# Altium PCB P-MT3620RDB-PS-1-0.PcbDoc (part 2 of 2)
Units mm, origin at the board's own origin, x right, y up, seen from the top; angles counter-clockwise.
Board outline 50 x 35 mm, 4 copper layers (Component Side, GND, 3V3, Bottom Layer), stack 0.537 mm thick; 57 components, 42 nets, 256 pads, 95 vias.
Unrouted connection lines stored in the file: 54.
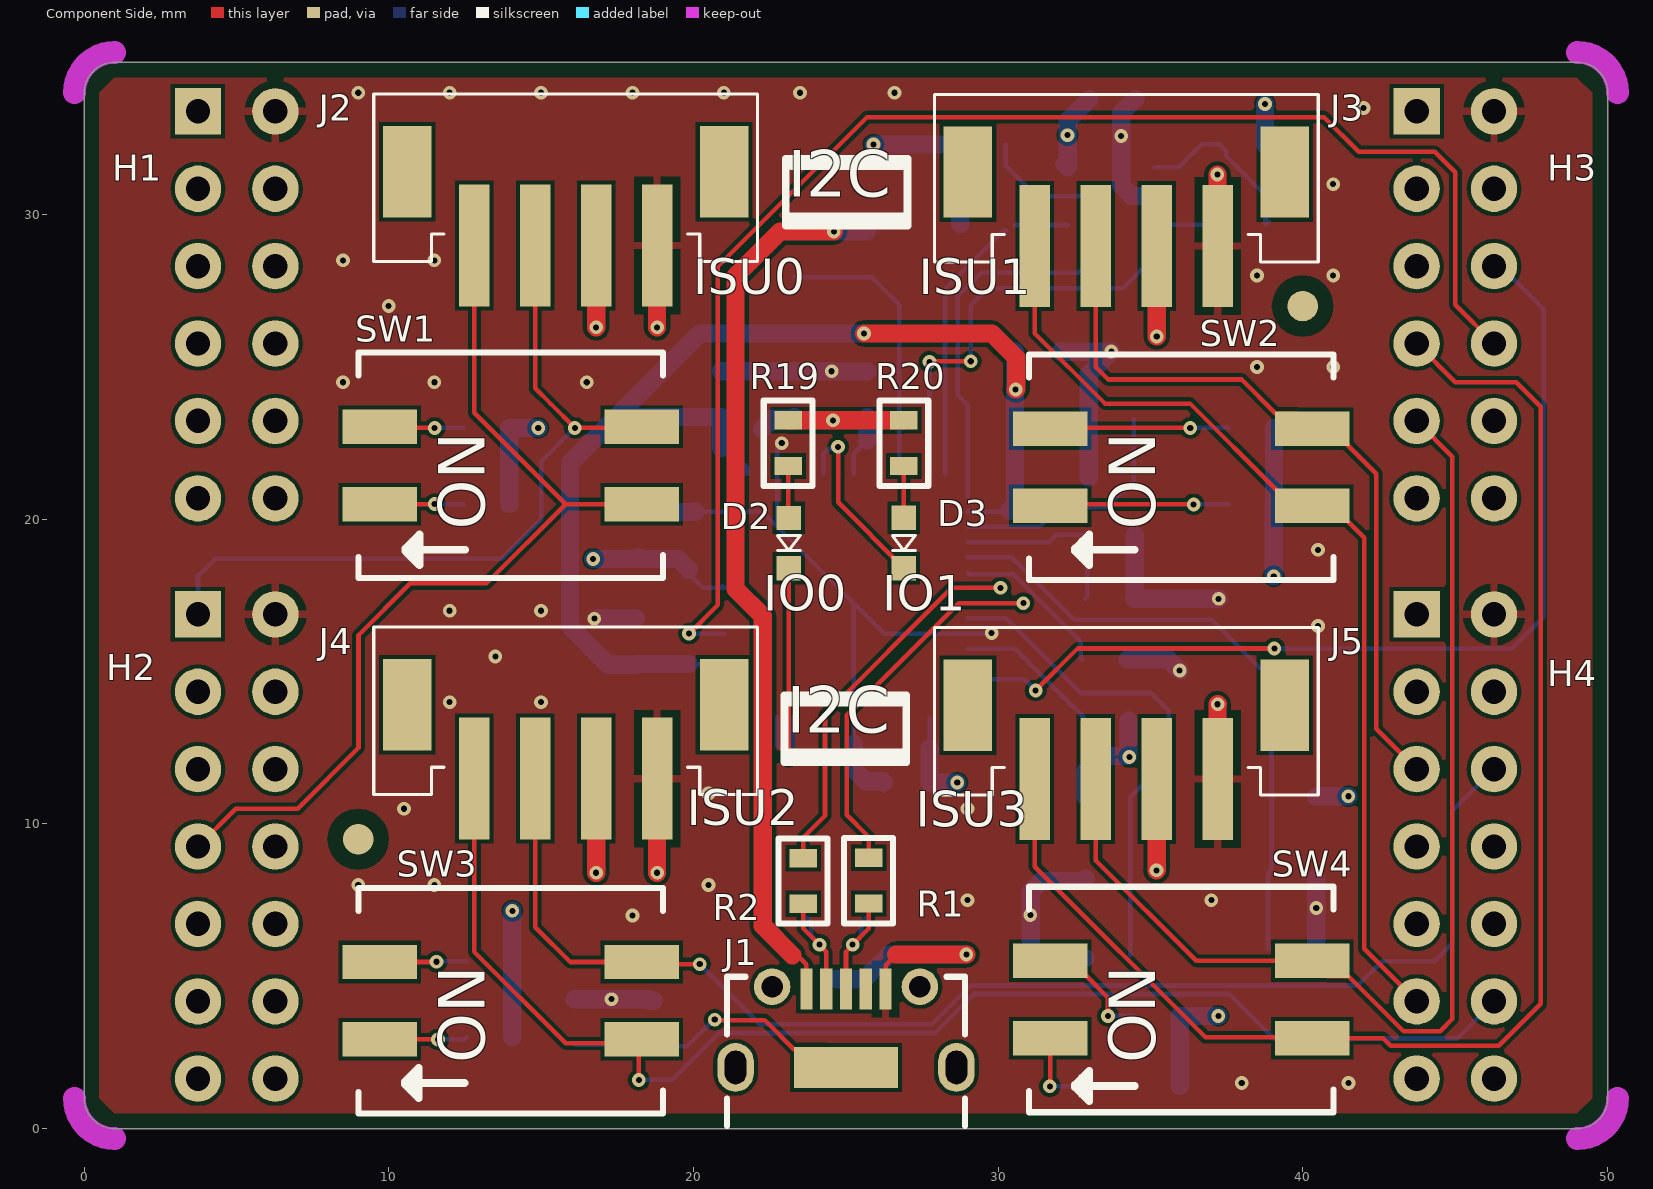
[diagram p0: Component Side view]

## Part data (continued)
X1: library part 8Z-12.000MAAJ-T, "Crystal 12MHz ±30ppm (Tol) ±30ppm (Stability) 18pF FUND 150Ohm 4-Pin SMD T/R", Case/Package=SMD/SMT, ESR (Equivalent Series Resistance)=150R, Frequency Stability=30ppm, Load Capacitance=18pF, Manufacturer=TXC, Max Operating Temperature=70°C, Min Operating Temperature=-20°C, Package Quantity=1, Supplier Part Number 1=887-1487-1-ND, Category=Crystals, ComponentLink1Description=https://datasheet.ciiva.com/28498/1838674-28498900.pdf?src-supplier=Element14, ComponentLink1URL=https://datasheet.ciiva.com/28498/1838674-28498900.pdf?src-supplier=Element14, ComponentLink2Description=https://datasheet.ciiva.com/4950/8z-12784-4950167.pdf?src-supplier=Mouser, ComponentLink2URL=https://datasheet.ciiva.com/4950/8z-12784-4950167.pdf?src-supplier=Mouser, ComponentLink3Description=https://datasheet.ciiva.com/859/8z-859072.pdf?src-supplier=Digi-Key, ComponentLink3URL=https://datasheet.ciiva.com/859/8z-859072.pdf?src-supplier=Digi-Key, ComponentLink4Description=https://datasheet.ciiva.com/859/8z-859073.pdf?src-supplier=Digi-Key, ComponentLink4URL=https://datasheet.ciiva.com/859/8z-859073.pdf?src-supplier=Digi-Key, ComponentLink5Description=https://datasheet.ciiva.com/859/8z-859071.pdf?src-supplier=Digi-Key, ComponentLink5URL=https://datasheet.ciiva.com/859/8z-859071.pdf?src-supplier=Digi-Key, ComponentLink6Description=https://datasheet.ciiva.com/8047/1041872-8047871.pdf?src-supplier=Element14, ComponentLink6URL=https://datasheet.ciiva.com/8047/1041872-8047871.pdf?src-supplier=Element14, Depth=2mm, Frequency=12MHz, Frequency Tolerance=30ppm, Height=0.022inch, Length=2.5mm, Manufacturer Part Number=8Z-12.000MAAJ-T, Mount="Surface Mount", Number of Pins=4, Packaging="Tape and Reel", Pricing 1="1=1.35000, 10=1.29000, 50=1.26000, 100=1.08000, 500=1.05000, 1000=0.88500 (USD)", REACH SVHC="No SVHC", RoHS=Yes, Stock 1=6521, Supplier 1=Digi-Key, Termination=SMD/SMT, Tolerance=30ppm, Width=0.079inch

## Free pads (board coordinates)
  round 1 smd far side paste-1 mask+0.5: 1(9,9.5) 1(40,27)
  round 1 smd paste-1 mask+0.5: 1(9,9.5) 1(40,27)

## Via types
v1: diameter 0.45, hole 0.2, Component Side to Bottom Layer, tented both sides, 95 vias

## Nets (pads, with @x,y where several pads share a name; then routed paths per layer and width w, separated by ;. In a path a pad name is that pad's centre, name@x,y a point inside that pad or via, vN(x,y) a via of type N, cw(c..) or ccw(c..) an arc to the next point about the centre after c; other vN are vias at no path point)
1V8: C5.2 C6.2 C13.2 U1.2 U1.31 U1.43 | length 41.2
  Component Side w0.6: v1(25.6,26.1) 29.8,26.1 30.6,25.3 30.6,24.28 v1(30.58,24.26)
  Bottom Layer w0.15: 19.86,15.25 U1.31 ; 20.91,22.35 21.473,21.787 21.685,21.787 21.76,21.712 U1.43 ; U1.2@29.04,20.28 U1.2 30.34,20.25 30.37,20.28
  Bottom Layer w0.6: 19.86,15.25 C6.2 18.085,15.225 17.205,15.225 15.95,16.48 15.95,21.84 17.47,23.36 ; 20.91,22.35 C13.2 17.47,23.36 ; v1(25.6,26.1) 20.21,26.1 17.47,23.36 ; 30.37,20.28 30.56,20.47 C5.2
3V3: C7.1 C8.2 C9.2 C10.2 C12.2 H3.3 J2.3 J3.3 J4.3 J5.3 L1.1 L2.1 R4.2 R5.2 R6.2 R8.1 R10.2 R11.1 R13.2 R14.1 R16.2 R17.1 R18.1 R19.2 R20.2 R21.2 U1.16 U1.36 U1.44 U1.50 U2.6 | length 61
  Component Side w0.6: v1(16.81,8.4) J4.3 ; v1(16.81,26.3) J2.3 ; R19.2 v1(24.58,23.25) R20.2 ; v1(35.2,8.48) 35.2,8.49 35.21,8.5 J5.3 ; v1(35.21,26) J3.3
  Bottom Layer w0.15: 19.51,18.42 19.51,18.7 ; 19.845,18.365 19.845,18.215 20.31,17.75 U1.36@20.951,17.75 ; U1.36@20.951,17.809 U1.36 ; U1.44 22.26,22.959 ; U1.50 25.26,22.15 25.71,22.6 ; 27.76,12.48 U1.16
  Bottom Layer w0.6: R10.2 R11.1 v1(14.91,23) ; R16.2 R17.1 v1(14.06,7.15) ; v1(16.71,18.7) 18.06,18.7 C9.2 ; C9.2@18.21,18.75 18.26,18.7 19.51,18.7 19.845,18.365 ; 22.26,22.959 22.611,23.31 23.26,23.31 C8.2 23.42,23.25 v1(24.58,23.25) 25.61,23.25 C10.2 25.71,22.6 ; v1(25.91,32.3) R5.2 R6.2 ; 27.76,12.48 27.75,12.47 C7.1 v1(28.66,11.36) ; U2.6@32.193,31.652 U2.6 32.285,33.075 C12.2 ; L2.1 32.88,10.905 32.88,11.74 33.37,12.23 34.28,12.23 R8.1 ; R18.1@35.96,1.4 35.96,3.7 v1(37.23,3.7) ; R4.2 v1(38.76,33.63) ; v1(39.05,18.13) R13.2 39.06,20.5 R14.1 ; L1.1 40.455,10.91 v1(41.497,10.91)
  other v1: 34.31,12.2 32.28,32.61
EECLK: R6.1 U1.56 U2.4 | length 10.6
  Bottom Layer w0.15: U1.56 28.26,27.55 30.19,29.48 R6.1@30.27,29.48 ; R6.1@30.56,29.66 U2.4
EECS: R5.1 U1.1 U2.5 | length 18.1
  Bottom Layer w0.15: U1.1 29.01,23.75 28.68,24.08 28.68,27.33 29.44,28.09 32.64,28.09 33.61,29.06 33.61,30.07 33.07,30.61 U2.5 31.26,30.61 30.26,31.61 R5.1
EEDATA: R7.1 U1.55 U2.3 | length 16.7
  Component Side w0.15: v1(27.75,25.17) 27.77,25.19 v1(29.105,25.19)
  Bottom Layer w0.15: v1(27.75,25.17) 27.75,21.51 U1.55 ; v1(29.105,25.19) 29.105,27.025 29.67,27.59 34.1,27.59 35.11,28.6 35.11,29.635 U2.3 35.145,29.67 R7.1@37.19,29.67
GND: C1.2 C2.2 C3.2 C4.1 C5.1 C6.1 C7.2 C8.1 C9.1 C10.1 C11.1 C12.1 C13.1 C14.2 C15.2 D1.3 H1.2 H2.2 H3.2 H4.2 J1.5 J2.4 J3.4 J4.4 J5.4 R3.1 R9.2 R15.2 U1.10 U1.21 U1.41 U1.45 U1.57 U2.2 X1.2 X1.4 | length 75.3
  Component Side w0.15: J1.5 26.31,5.369 26.661,5.72
  Component Side w0.6: v1(18.81,8.4) J4.4 ; v1(18.81,26.3) J2.4 ; 26.661,5.72 v1(28.96,5.72) ; J5.4@37.2,11.465 J5.4 37.2,11.485 v1@37.2,13.94 ; v1(37.2,31.32) 37.2,28.985 J3.4 ; v1@37.201,13.94 v1(37.209,13.932)
  Bottom Layer w0.15: 20.06,20.25 U1.41 ; U1.41 22.26,20.25 U1.57@22.76,19.75 ; v1(22.9,22.5) 22.76,22.36 U1.45 U1.57@22.76,19.75 ; 25.26,12.62 U1.21 U1.57@25.26,17.25 ; C7.2@26.24,11.09 C7.2@26.25,11.1 ; v1(29.79,16.27) 29.77,16.25 U1.10 26.26,16.25 U1.57@25.26,17.25 ; X1.2 X1.2@32.98,21.37 ; U1.57@22.76,19.75 U1.57 U1.57@25.26,17.25
  Bottom Layer w0.6: C11.1 18.51,4.25 18.56,4.2 R3.1 ; v1@16.85,16.75 C6.1 ; C9.1@18.21,20.25 18.216,20.244 20.054,20.244 20.06,20.25 ; C13.1 C8.1 v1(24.539,24.86) 24.549,24.85 C10.1 ; D1.3 25.6,4.9 26.42,5.72 v1(28.96,5.72) ; 25.26,12.62 25.26,11.81 25.67,11.4 26.21,11.4 C7.2 ; C5.1 v1@33.71,25.5 ; C4.1 32.76,5.6 31.421,5.6 31.07,5.951 31.07,7.779 31.421,8.13 32.805,8.13 C2.2 ; C14.2 32.98,23.32 32.98,24.77 v1@33.71,25.5 ; X1.2@32.98,21.37 C14.2@32.98,23.3 ; v1(33.72,25.51) v1@33.71,25.5 ; R9.2 35.6,15.4 v1(35.96,15.04) ; X1.4 34.485,17.425 C15.2 34.47,17.39 v1(37.24,17.39) ; C12.1 34.04,33.33 34.04,30.961 34.391,30.61 U2.2 ; C3.2@40.445,5.985 v1(40.445,7.243) C1.2
  other v1: 38,1.5 41.5,1.5 17.31,4.25 18,7 31.06,7.01 29,7.5 37,7.5 9,8 11.5,8 20.5,8 10.5,10.5 29,10.5 20.5,11 12,14 15,14 13.5,15.5 40.5,16.5 16.75,16.74 12,17 15,17 40.5,19 8.5,24.5 11.5,24.5 16.5,24.5 38.5,25 41,25 10,27 38.5,28 41,28 8.5,28.5 11.5,28.5 41,31 34.04,32.58 42,33.5 9,34 12,34 15,34 18,34 21,34 23.5,34 26.6,34
GPIO27_MOSI0_RTS0_CLK0: H2.7 J2.1 SW1.1 | length 31.1
  Component Side w0.15: H2.7 4.979,10.5 7.01,10.5 9.01,12.5 9.01,16.2 10.71,17.9 13.21,17.9 15.81,20.5 ; J2.1 12.81,23.5 15.81,20.5 ; SW1.1 15.81,20.5
GPIO28_MISO0_RXD0_DATA0: H2.1 J2.2 SW1.2 | length 25.5
  Component Side w0.15: J2.2 14.81,24.3 15.31,23.8 v1(16.11,23) 18.27,23 SW1.2
  Bottom Layer w0.15: H2.1 3.74,18.13 4.31,18.7 13.71,18.7 15.01,20 15.01,21.9 v1(16.11,23)
GPIO32_MOSI1_RTS1_CLK1: H4.11 J3.1 SW2.1 | length 32.4
  Component Side w0.15: J3.1 31.21,26.1 33.51,23.8 36.3,23.8 39.165,20.935 39.165,20.93 39.655,20.44 SW2.1 40.965,20.44 41.505,19.9 41.51,19.9 42.02,19.39 42.02,5.901 H4.11
GPIO33_MISO1_RXD1_DATA1: H4.5 J3.2 SW2.2 | length 24.9
  Component Side w0.15: J3.2 33.21,25 33.62,24.59 38,24.59 39.12,23.47 39.82,23.47 SW2.2 40.965,22.98 41.467,22.478 41.467,22.443 42.41,21.5 42.41,13.131 H4.5
GPIO37_MOSI2_RTS2_CLK2: H4.12 J4.1 SW3.1 | length 43.9
  Component Side w0.15: J4.1 12.81,5.8 15.81,2.8 18.18,2.8 18.21,2.77 v1(18.21,1.6)
  Bottom Layer w0.15: v1(18.21,1.6) 19.31,1.6 20.85,3.14 27.93,3.14 29.21,4.42 37.59,4.42 39.05,2.96 45.07,2.96 46.28,4.17 H4.12
GPIO38_MISO2_RXD2_DATA2: H4.6 J4.2 SW3.2 | length 43.7
  Component Side w0.15: J4.2 14.81,6.616 15.956,5.47 SW3.2 18.38,5.4 v1(20.21,5.4)
  Bottom Layer w0.15: v1(20.21,5.4) 22.18,3.43 27.831,3.43 29.101,4.7 41.81,4.7 42.61,5.5 44.33,5.5 44.91,6.08 44.91,10.431 H4.6
GPIO67_MOSI3_RTS3_CLK3: H3.7 J5.1 SW4.1 | length 47
  Component Side w0.15: J5.1 31.21,8.6 36.81,3 40.28,3 SW4.1 42.637,2.97 42.887,2.72 46.43,2.72 47.81,4.1 47.81,23.7 47.01,24.5 45.01,24.5 H3.7
GPIO68_MISO3_RXD3_DATA3: H3.9 J5.2 SW4.2 | length 37
  Component Side w0.15: J5.2 33.21,8.8 36.5,5.51 SW4.2 40.812,5.007 41.503,5.007 43.31,3.2 44.51,3.2 44.91,3.6 44.91,22.06 H3.9
IO0_TXD: H3.6 U1.13 | length 32.4
  Component Side w0.15: v1(31.235,14.384) 32.61,15.76 v1(39.07,15.76)
  Bottom Layer w0.15: U1.13 30.88,14.75 31.235,14.395 v1(31.235,14.384) ; v1(39.07,15.76) 39.08,15.75 46.86,15.75 47.91,16.8 47.91,26.9 46.5,28.31 H3.6
IO1_TXD: H3.8 U1.33 | length 46.7
  Component Side w0.15: v1(19.86,16.25) 20.8,17.19 20.8,28.3 25.7,33.2 40.7,33.2 41.84,32.06 44.34,32.06 45.01,31.39 45.01,27.04 H3.8
  Bottom Layer w0.15: v1(19.86,16.25) U1.33
LED_A: D2.1 U1.25 U1.26 | length 9
  Component Side w0.15: v1(23.13,12.21) 23.13,18.39 D2.1
  Bottom Layer w0.15: U1.26 22.76,12.58 v1(23.13,12.21) 23.13,12.291 23.26,12.421 U1.25
LED_B: D3.1 U1.48 U1.49 | length 7
  Component Side w0.15: v1(24.75,22.38) 24.75,20.56 D3.1
  Bottom Layer w0.15: U1.48 24.27,21.51 24.27,22.15 24.457,22.337 24.707,22.337 v1(24.75,22.38) 24.75,21.51 U1.49
NetC1_1: C1.1 C3.1 L1.2 U1.5 | length 20.5
  Bottom Layer w0.15: U1.5 30.45,18.75 32.5,16.7 37.01,16.7 38.975,14.735 38.975,11 38.975,8.5 38.86,8.385 C3.1@38.86,5.9
NetC2_1: C2.1 C4.2 L2.2 U1.9 | length 16.4
  Bottom Layer w0.15: U1.9 30.26,16.75 32.71,14.3 35.01,14.3 35.61,13.7 35.61,12.165 34.783,11.338 34.783,11.322 34.36,10.9 L2.2 C2.1 34.345,5.715 C4.2@34.36,5.7
NetC11_2: C11.2 J1.6 R3.2 | length 9.9
  Component Side w0.15: v1(20.703,3.577) 20.72,3.56 22.35,3.56 23.3,2.61 24.41,2.61 J1.6
  Bottom Layer w0.15: C11.2 18.66,2.75 R3.2 19.79,2.7 20.65,3.56 20.687,3.56 v1(20.703,3.577)
NetD1_1: D1.1 J1.2 R2.1 | length 4.4
  Component Side w0.15: R2.1 23.6,6.58 v1(24.14,6.04) 24.14,6.022 24.36,5.802 J1.2 ; J1.2@24.31,5.095 24.26,5.045 24.36,4.945 J1.2@24.35,4.935
  Bottom Layer w0.15: D1.1 23.867,6.783 23.867,6.313 v1(24.14,6.04)
NetD1_2: D1.2 J1.3 R1.1 | length 4.1
  Component Side w0.15: J1.3 25.01,5.802 25.23,6.022 v1(25.23,6.04) 25.75,6.56 R1.1
  Bottom Layer w0.15: v1(25.23,6.04) 25.503,6.313 25.503,6.753 D1.2
NetD2_2: D2.2 R19.1 | length 1.7
  Component Side w0.15: R19.1 23.11,20.07 D2.2
NetD3_2: D3.2 R20.1 | length 1.7
  Component Side w0.15: R20.1 D3.2 D3.2@26.925,20.065
NetR1_2: R1.2 U1.8 | length 14.1
  Component Side w0.15: R1.2 25.75,9.58 25.03,10.3 25.03,13.57 28.71,17.25 v1(30.83,17.25)
  Bottom Layer w0.15: U1.8 v1(30.83,17.25)
NetR2_2: R2.2 U1.7 | length 13.9
  Component Side w0.15: R2.2@23.825,9.105 R2.2 23.6,9.55 24.32,10.27 24.32,13.59 28.48,17.75 v1(30.081,17.75)
  Bottom Layer w0.15: U1.7 v1(30.081,17.75)
NetR4_1: R4.1 R7.2 U2.1 | length 5.8
  Bottom Layer w0.15: U2.1 35.93,31.56 36.68,32.31 R4.1 37.485,32.085 37.485,31.925 38.78,30.63 R7.2 R7.2@38.88,29.77
NetR8_2: R8.2 U1.11 | length 4.8
  Bottom Layer w0.15: U1.11 30.56,15.75 31.535,14.775 32.533,13.777 32.543,13.777 32.78,13.54 R8.2
NetR9_1: R9.1 U1.6 | length 5.2
  Bottom Layer w0.15: U1.6 29.06,18.2 30.5,18.2 32.713,15.987 32.713,15.447 R9.1
NetR10_1: R10.1 SW1.4 | length 2.8
  Component Side w0.15: SW1.4 v1(11.51,20.5)
  Bottom Layer w0.15: v1(11.51,20.5) R10.1
NetR11_2: R11.2 SW1.3 | length 2.8
  Component Side w0.15: SW1.3 9.75,23 v1(11.51,23)
  Bottom Layer w0.15: v1(11.51,23) 11.61,23 R11.2
NetR12_1: R12.1 R15.1 U1.53 | length 9.4
  Bottom Layer w0.15: R15.1 R12.1 25.85,27.95 26.075,27.725 26.76,27.04 U1.53
NetR13_1: R13.1 SW2.4 | length 5.9
  Component Side w0.15: SW2.4 31.76,20.49 v1(36.42,20.49)
  Bottom Layer w0.15: v1(36.42,20.49) R13.1
NetR14_2: R14.2 SW2.3 | length 5.9
  Component Side w0.15: SW2.3 31.73,23 v1(36.31,23)
  Bottom Layer w0.15: v1(36.31,23) R14.2
NetR16_1: R16.1 SW3.4 | length 2.9
  Component Side w0.15: SW3.4 9.74,2.9 9.77,2.93 v1(11.62,2.93)
  Bottom Layer w0.15: v1(11.62,2.93) 12.43,2.93 12.46,2.9 R16.1
NetR17_2: R17.2 SW3.3 | length 2.9
  Component Side w0.15: SW3.3@9.75,5.49 9.74,5.5 SW3.3 11.56,5.47 v1(11.57,5.48)
  Bottom Layer w0.15: v1@11.62,5.49 12.55,5.49 R17.2
NetR18_2: R18.2 SW4.4 | length 4.3
  Component Side w0.15: v1(31.7,1.39) 31.71,1.4 31.71,1.67 SW4.4
  Bottom Layer w0.15: v1(31.7,1.39) 34.45,1.39 R18.2@34.46,1.4
NetR21_1: R21.1 SW4.3 | length 4
  Component Side w0.15: SW4.3 32.2,5.02 32.89,5.02 33.61,4.3 v1(33.61,3.7) v1@33.575,3.735
  Bottom Layer w0.15: v1(33.61,3.7) 33.61,3.8 33.71,3.7 R21.1@34.46,3.7
OSCI: C14.1 U1.3 X1.3 | length 8.1
  Bottom Layer w0.15: U1.3 31.36,19.75 32.01,20.4 33.56,20.4 34.06,20.9 34.11,20.9 34.485,21.275 34.46,21.3 C14.1
OSCO: C15.1 U1.4 X1.1 | length 6.1
  Bottom Layer w0.15: U1.4 31.66,19.25 31.91,19.5 32.91,19.5 X1.1 32.935,17.475 C15.1@32.86,17.4
VBUS: J1.1 R12.2 | length 29.4
  Component Side w0.15: 23.25,5.69 23.42,5.69 23.71,5.4 J1.1
  Component Side w0.6: 23.25,5.69 22.28,6.66 22.28,16.82 21.38,17.72 21.38,27.98 22.85,29.45 v1(24.61,29.45)
  Bottom Layer w0.6: v1(24.61,29.45) R12.2
pads on no net: H1.1 H1.3 H1.4 H1.5 H1.6 H1.7 H1.8 H1.9 H1.10 H1.11 H1.12 H2.3 H2.4 H2.5 H2.6 H2.8 H2.9 H2.10 H2.11 H2.12 H2.13 H2.14 H3.1 H3.4 H3.5 H3.10 H3.11 H3.12 H4.1 H4.3 H4.4 H4.7 H4.8 H4.9 H4.10 H4.13 H4.14 J1.4 J1.7 J1.8 J1.9 J1.10 J2.A1 J3.A1 J4.A1 J5.A1 U1.12 U1.14 U1.15 U1.17 U1.18 U1.19 U1.20 U1.22 U1.23 U1.24 U1.27 U1.28 U1.29 U1.30 U1.32 U1.34 U1.35 U1.37 U1.38 U1.39 U1.40 U1.42 U1.46 U1.47 U1.51 U1.52 U1.54

## Polygon pours and split planes (outlines as drawn)
GND on Component Side "GND_L01_P004" (solid, pour order 4): 49.5,34 49,34.5 1,34.5 0.5,34 0.5,1 1,0.5 49,0.5 49.5,1
GND on Bottom Layer "GND_L04_P003" (solid, pour order 3): 49.5,34 49,34.5 1,34.5 0.5,34 0.5,1 1,0.5 49,0.5 49.5,1
3V3 on 3V3 (split plane): 49.106,34.482 49.198,34.454 49.283,34.409 49.358,34.348 49.419,34.273 49.464,34.188 49.492,34.096 49.501,34.012 49.5,34 49.5,1 49.501,0.988 49.492,0.904 49.464,0.812 49.419,0.727 49.358,0.652 49.283,0.591 49.198,0.546 49.106,0.518 49.022,0.509 49.01,0.51 1.01,0.51 0.998,0.509 0.914,0.518 0.822,0.546 0.737,0.591 0.662,0.652 0.601,0.727 0.556,0.812 0.528,0.904 0.519,0.988 0.52,1 0.52,34 0.519,34.012 0.528,34.096 0.556,34.188 0.601,34.273 0.662,34.348 0.737,34.409 0.822,34.454 0.914,34.482 0.998,34.491 1.01,34.49 49.01,34.49 49.022,34.491
GND on GND (split plane): 49.106,34.482 49.198,34.454 49.283,34.409 49.358,34.348 49.419,34.273 49.464,34.188 49.492,34.096 49.501,34.012 49.5,34 49.5,1 49.501,0.988 49.492,0.904 49.464,0.812 49.419,0.727 49.358,0.652 49.283,0.591 49.198,0.546 49.106,0.518 49.022,0.509 49.01,0.51 1.01,0.51 0.998,0.509 0.914,0.518 0.822,0.546 0.737,0.591 0.662,0.652 0.601,0.727 0.556,0.812 0.528,0.904 0.519,0.988 0.52,1 0.52,34 0.519,34.012 0.528,34.096 0.556,34.188 0.601,34.273 0.662,34.348 0.737,34.409 0.822,34.454 0.914,34.482 0.998,34.491 1.01,34.49 49.01,34.49 49.022,34.491

## Keep-outs
Keep-Out Layer:
  lines w0.75: -0.316,1 ccw(c1.01,1) 1.01,-0.326 ; -0.316,34 cw(c1.01,34) 1.01,35.326 ; 49.01,-0.326 ccw(c49.01,1) 50.336,1 ; 49.01,35.326 cw(c49.01,34) 50.336,34

## Silkscreen, mask and mechanical layers (free items; w line width, h text height)
Top Overlay:
  lines w0.25: 22.99,12.03 26.99,12.03 26.99,13.13 26.99,14.23 22.99,14.23 22.99,13.13 22.99,12.03 ; 23.03,29.63 27.03,29.63 27.03,30.73 27.03,31.83 23.03,31.83 23.03,30.73 23.03,29.63
  lines w0.254: 10.76,1.23 10.76,1.77 ; 10.78,18.73 10.78,19.27 ; 12.49,1.5 10.53,1.5 ; 12.51,19 10.55,19 ; 32.76,1.13 32.76,1.67 ; 32.76,18.73 32.76,19.27 ; 34.49,1.4 32.53,1.4 ; 34.49,19 32.53,19 ; 10.53,1.5 10.53,1.54 10.99,2 10.99,1.5 10.99,1 10.53,1.46 10.53,1.5 ; 10.55,19 10.55,18.96 11.01,18.5 11.01,19 11.01,19.5 10.55,19.04 10.55,19 ; 32.53,1.4 32.53,1.44 32.99,1.9 32.99,1.4 32.99,0.9 32.53,1.36 32.53,1.4 ; 32.53,19 32.53,19.04 32.99,19.5 32.99,19 32.99,18.5 32.53,18.96 32.53,19
  lines w0.3: 23.19,14.01 26.8,14.01 ; 23.23,31.61 26.84,31.61
  lines w0.35: 23.06,12.3 26.85,12.3 ; 23.1,29.9 26.89,29.9
  text "H1" at 0.93,31.12 h0.85
  text "H3" at 48.03,31.12 h0.85
  text "I2C" at 23.105,30.08 h2.6
  text "ISU0" at 20,27 h2
  text "ISU1" at 27.4,27 h2
  text "IO0" at 22.3,16.6 h2
  text "IO1" at 26.2,16.6 h2
  text "H2" at 0.73,14.72 h0.85
  text "H4" at 48.03,14.52 h0.85
  text "I2C" at 23.065,12.48 h2.6
  text "ISU2" at 19.78,9.56 h2
  text "ISU3" at 27.3,9.518 h2
Bottom Overlay:
  region: 8.9,34.475 8.9,32.2 12.3,32.2 12.3,34.475
  rectangle: 8.9,24.6 17.6,31.2
  text "P-MT3620RDB-PS-1-0" at 27.2,32.7 h2
Mechanical 31:
  the board outline again, w0.1

## Text inside footprints (layer, text, board x,y; h text height)
SW1: Top Overlay "ON" at 13.156,19.654 h1.52 r90
SW2: Top Overlay "ON" at 35.156,19.654 h1.52 r90
SW3: Top Overlay "ON" at 13.156,2.154 h1.52 r90
SW4: Top Overlay "ON" at 35.156,2.154 h1.52 r90